# EAGLE board CHECON.PCB.Button (EAGLE 6.6.0)

No outline drawn. Coordinates in mm, seen from the top.
Copper layers (1*16): Top 0.035mm / dielectric 1.5mm / Bottom 0.035mm
Design rules "default *": minimum track width 12mil, minimum drill 0.1mm, track to track 0.25mm, track to pad 0.25mm, pad to pad 0.25mm, via to via 0.25mm, smd to smd 0.25mm, copper to edge 0.25mm, drill to drill 0.25mm, minimum pad ring 0.1mm, minimum via ring 8mil, stop-mask expansion 4mil, vias tented up to drill 0.81mm, thermal gap 10mil
Milling: 38 lines

## Footprints (pad centres in the part's own frame; a part is rotated, then mirrored left to right if it is on the bottom)
RGBLED = smd 1.2 x 0.9: P$1 1.4,-0.725; P$2 1.4,0.725; P$3 -1.4,0.725; P$4 -1.4,-0.725 | hole 0.61: 2.019,2.045; -2.019,-2.045
SWITCH-TACTILE-FSM = drill 0.99: P$1 -3.25,2.25; P$2 3.25,2.25; P$3 -3.25,-2.25; P$4 3.25,-2.25
RA_BUTTON = drill 0.99: P$1 -2.25,0; P$2 2.25,0 | hole 1.3: -3.501,2.49; 3.501,2.49

## Placement (x,y rotation side)
U$1  RGLBED  [RGBLED]  -33.82,14.11 180 top
U$13  SWITCH-TACTILE-FSM  [SWITCH-TACTILE-FSM]  -33.82,-7.06 0 top
U$14  SWITCH-TACTILE-FSM  [SWITCH-TACTILE-FSM]  -33.82,7.05 0 top
U$15  SWITCH-TACTILE-FSM  [SWITCH-TACTILE-FSM]  -33.82,-0.01 0 top
U$16  SWITCH-TACTILE-FSM  [SWITCH-TACTILE-FSM]  -33.82,-14.12 0 top
U$30  RA_BUTTON  [RA_BUTTON]  -33.07,-22.91 0 bottom

## Library data of the parts
U$1 U$30 = KW2
U$13-U$16 = GW-devices; MFGN: E-Switch; MFGP: TL3301DF160QG

## Nets
GND [GND]: U$13.P$1 U$13.P$2 U$14.P$1 U$14.P$2 U$15.P$1 U$15.P$2 U$16.P$1 U$16.P$2 U$30.P$1
N$5: U$1.P$4
N$6: U$30.P$2
N$8: U$1.P$3
N$9: U$1.P$1
N$36: U$14.P$4
N$37: U$13.P$4
N$42: U$16.P$4
V+: U$1.P$2

## Tracks (layer width: path | path; a pad name or v marks a point on that pad's centre or on a via)
GND  (8 unrouted)